# EAGLE board mbhp_core_v3 (EAGLE 6.4)
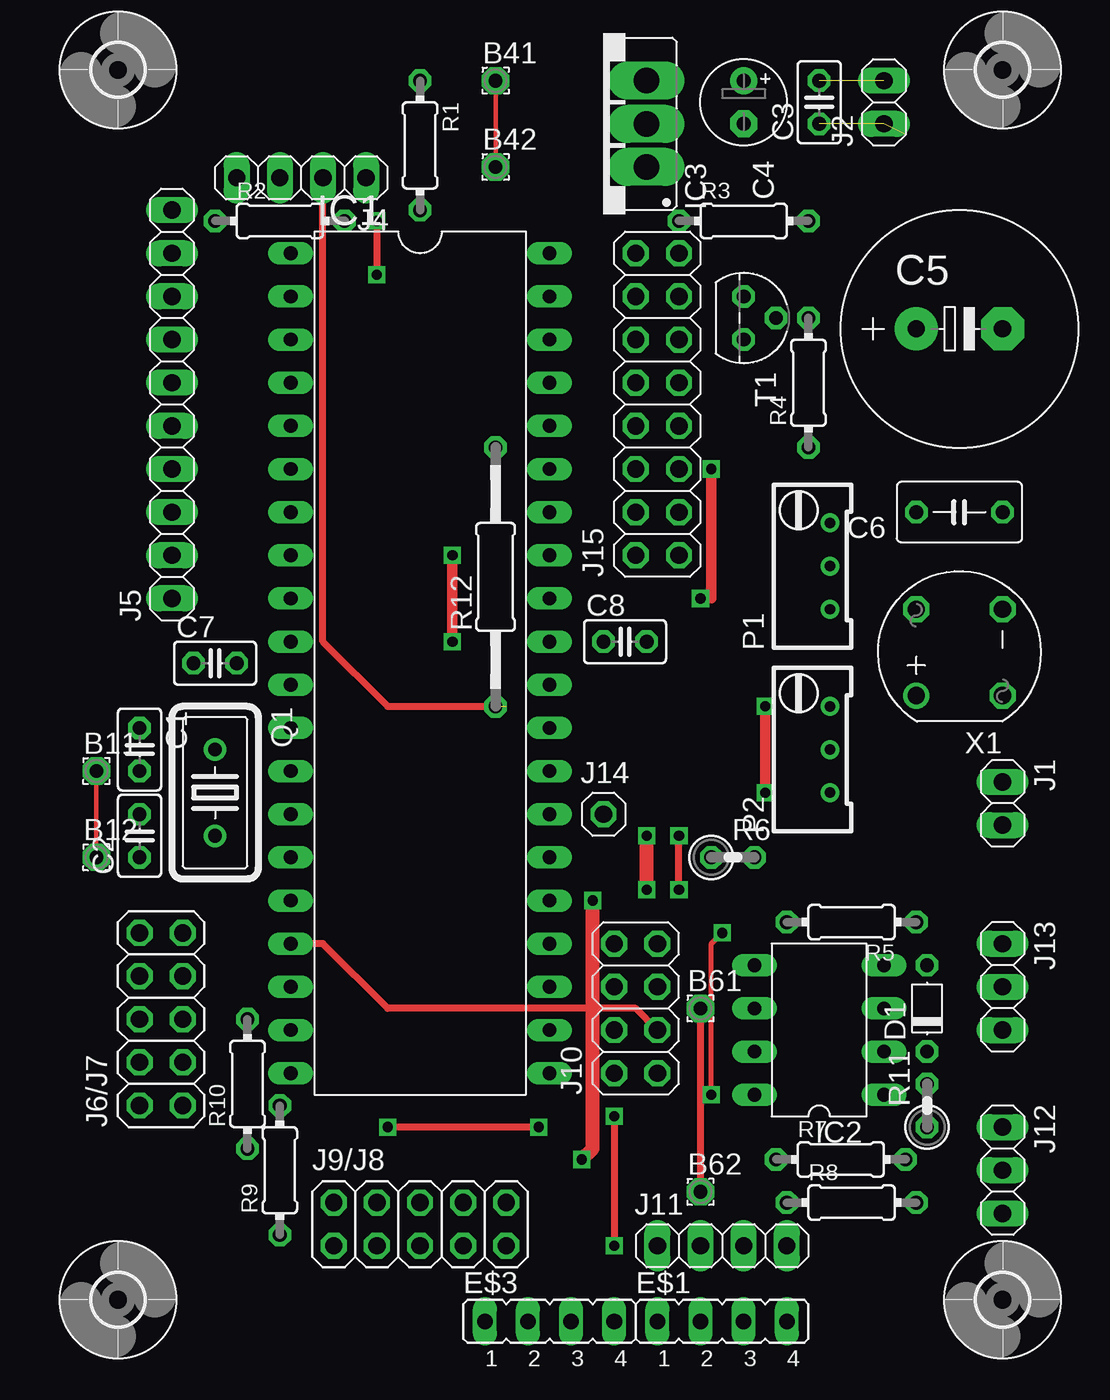
[diagram p0: board, top side]
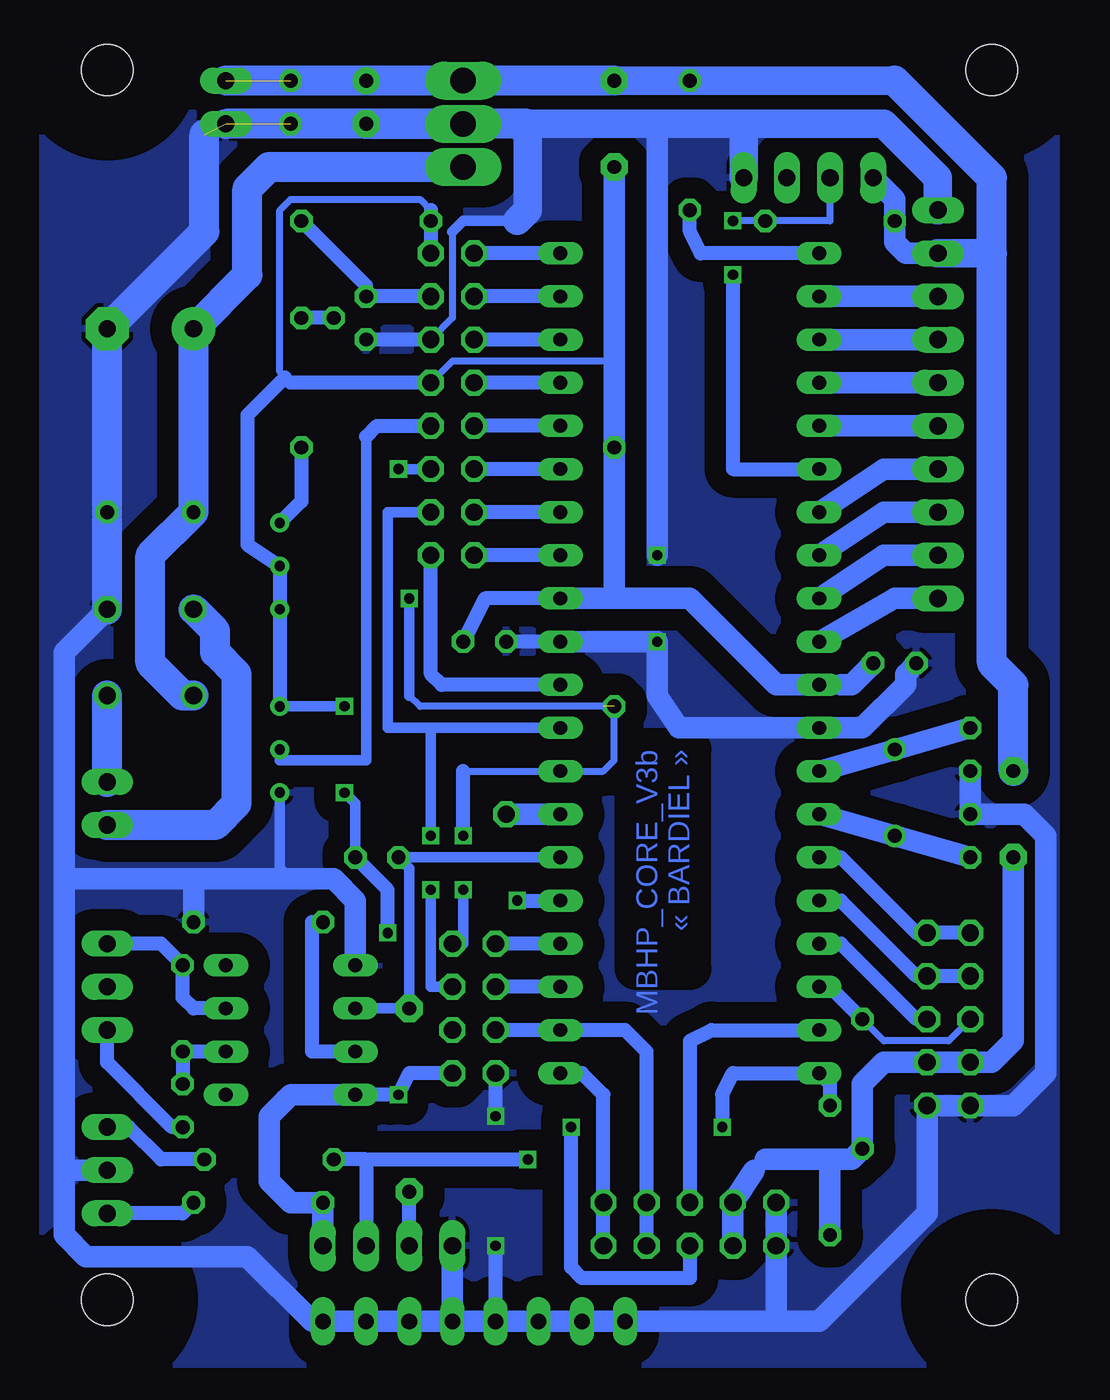
[diagram p1: board, bottom side, seen from below]

No outline drawn. Coordinates in mm, seen from the top.
Copper layers (1*16): Top 0.035mm / dielectric 1.5mm / Bottom 0.035mm
Design rules "default": minimum track width 10mil, minimum drill 24mil, track to track 8mil, track to pad 8mil, pad to pad 8mil, via to via 8mil, smd to smd 8mil, copper to edge 40mil, drill to drill 8mil, minimum pad ring 10mil, minimum via ring 8mil, stop-mask expansion 0mil, vias tented up to drill 0mil, thermal gap 10mil

## Footprints (pad centres in the part's own frame; a part is rotated, then mirrored left to right if it is on the bottom)
1,6/0,8 = drill 0.813 pad 1.6 octagon: 1 0,0
C025-025X050 = drill 0.813 octagon: 1 -1.27,0; 2 1.27,0
E2,5-5 = drill 0.813 pad 1.6: + -1.27,0 | drill 0.813 pad 1.6 octagon: - 1.27,0
E5-13 = drill 1.016 pad 2.54: + -2.54,0 | drill 1.016 pad 2.54 octagon: - 2.54,0
C050-035X075 = drill 0.813 octagon: 1 -2.54,0; 2 2.54,0
D-5 = drill 0.813 octagon: A 2.54,0; C -2.54,0
JP4 = drill 0.914 long: 1 -3.81,0; 2 -1.27,0; 3 1.27,0; 4 3.81,0
3,0 = hole 3: 0,0
DIL40 = drill 0.813 long: 1 -24.13,-7.62; 2 -21.59,-7.62; 3 -19.05,-7.62; 4 -16.51,-7.62; 5 -13.97,-7.62; 6 -11.43,-7.62; 7 -8.89,-7.62; 8 -6.35,-7.62; 9 -3.81,-7.62; 10 -1.27,-7.62; 11 1.27,-7.62; 12 3.81,-7.62; 13 6.35,-7.62; 14 8.89,-7.62; 15 11.43,-7.62; 16 13.97,-7.62; 17 16.51,-7.62; 18 19.05,-7.62; 19 21.59,-7.62; 20 24.13,-7.62; 21 24.13,7.62; 22 21.59,7.62; 23 19.05,7.62; 24 16.51,7.62; 25 13.97,7.62; 26 11.43,7.62; 27 8.89,7.62; 28 6.35,7.62; 29 3.81,7.62; 30 1.27,7.62; 31 -1.27,7.62; 32 -3.81,7.62; 33 -6.35,7.62; 34 -8.89,7.62; 35 -11.43,7.62; 36 -13.97,7.62; 37 -16.51,7.62; 38 -19.05,7.62; 39 -21.59,7.62; 40 -24.13,7.62
DIL08 = drill 0.813 long: 1 -3.81,-3.81; 2 -1.27,-3.81; 3 1.27,-3.81; 4 3.81,-3.81; 5 3.81,3.81; 6 1.27,3.81; 7 -1.27,3.81; 8 -3.81,3.81
78XXS_ = drill 1.499 pad 1.93 long: GND 0,-2.54; IN -2.54,-2.54; OUT 2.54,-2.54
1X02 = drill 1.016 long: 1 -1.27,0; 2 1.27,0
1X04 = drill 1.016 long: 1 -3.81,0; 2 -1.27,0; 3 1.27,0; 4 3.81,0
1X10 = drill 1.016 long: 1 -11.43,0; 2 -8.89,0; 3 -6.35,0; 4 -3.81,0; 5 -1.27,0; 6 1.27,0; 7 3.81,0; 8 6.35,0; 9 8.89,0; 10 11.43,0
2X05 = drill 1.016 octagon: 1 -5.08,-1.27; 2 -5.08,1.27; 3 -2.54,-1.27; 4 -2.54,1.27; 5 0,-1.27; 6 0,1.27; 7 2.54,-1.27; 8 2.54,1.27; 9 5.08,-1.27; 10 5.08,1.27
2X04 = drill 1.016 octagon: 1 -3.81,-1.27; 2 -3.81,1.27; 3 -1.27,-1.27; 4 -1.27,1.27; 5 1.27,-1.27; 6 1.27,1.27; 7 3.81,-1.27; 8 3.81,1.27
1X03 = drill 1.016 long: 1 -2.54,0; 2 0,0; 3 2.54,0
1X01 = drill 1.016 octagon: 1 0,0
2X08 = drill 1.016 octagon: 1 -8.89,-1.27; 2 -8.89,1.27; 3 -6.35,-1.27; 4 -6.35,1.27; 5 -3.81,-1.27; 6 -3.81,1.27; 7 -1.27,-1.27; 8 -1.27,1.27; 9 1.27,-1.27; 10 1.27,1.27; 11 3.81,-1.27; 12 3.81,1.27; 13 6.35,-1.27; 14 6.35,1.27; 15 8.89,-1.27; 16 8.89,1.27
RTRIM64W = drill 0.61: 1 1.27,-2.54; 2 1.27,0; 3 1.27,2.54
HC18U-V = drill 0.813: 1 -2.54,0; 2 2.54,0
0204/7 = drill 0.813 octagon: 1 -3.81,0; 2 3.81,0
0207/2V = drill 0.813 octagon: 1 -1.27,0; 2 1.27,0
0207/15 = drill 0.813 octagon: 1 -7.62,0; 2 7.62,0
TO92 = drill 0.813 octagon: 1 1.27,0; 2 0,1.905; 3 -1.27,0
RB1A = drill 1.016: + -2.54,2.54 | drill 1.016 octagon: - 2.54,-2.54; AC1 2.54,2.54; AC2 -2.54,-2.54

## Placement (x,y rotation side)
B11  [1,6/0,8]  2.54,34.92 0 top
B12  [1,6/0,8]  2.54,29.84 0 top
B41  [1,6/0,8]  26.04,75.56 0 top
B42  [1,6/0,8]  26.04,70.48 0 top
B61  [1,6/0,8]  38.1,20.95 0 top
B62  [1,6/0,8]  38.1,10.16 0 top
C1  33pF  [C025-025X050]  5.08,36.2 270 top
C2  33pF  [C025-025X050]  5.08,31.11 90 top
C3  100nF  [C025-025X050]  45.09,74.3 90 top
C4  10uF  [E2,5-5]  40.64,74.3 270 top
C5  2200uF  [E5-13]  53.34,60.96 0 top
C6  330nF  [C050-035X075]  53.34,50.16 180 top
C7  100nF  [C025-025X050]  9.53,41.27 0 top
C8  100nF  [C025-025X050]  33.66,42.55 0 top
D1  1N4148  [D-5]  51.44,20.95 90 top
E$1  [JP4]  39.37,2.54 0 top
E$3  [JP4]  29.21,2.54 0 top
E$26  [3,0]  3.81,76.2 0 top
E$27  [3,0]  55.88,76.2 0 top
E$28  [3,0]  55.88,3.81 0 top
E$29  [3,0]  3.81,3.81 0 top
IC1  PIC18F452  [DIL40]  21.59,41.27 270 top
IC2  6N138  [DIL08]  45.09,19.68 90 top
IC3  7805  [78XXS_]  32.38,73.03 90 top
J1  [1X02]  55.88,33.02 270 top
J2  [1X02]  48.9,74.3 90 top
J4  [1X04]  14.61,69.85 180 top
J5  [1X10]  6.99,56.52 90 top
J6/J7  [2X05]  6.35,20.32 90 top
J9/J8  [2X05]  21.59,8.26 0 top
J10  [2X04]  34.29,20.95 90 top
J11  [1X04]  39.37,6.99 0 top
J12  [1X03]  55.88,11.43 270 top
J13  [1X03]  55.88,22.23 270 top
J14  [1X01]  32.38,32.38 0 top
J15  [2X08]  35.56,56.52 90 top
P1  10k  [RTRIM64W]  44.45,46.99 0 top
P2  10k  [RTRIM64W]  44.45,36.2 0 top
Q1  10-HC18  [HC18U-V]  9.53,33.66 270 top
R1  100  [0204/7]  21.59,71.75 270 top
R2  1k  [0204/7]  13.34,67.31 0 top
R3  10k  [0204/7]  40.64,67.31 0 top
R4  1k  [0204/7]  44.45,57.78 90 top
R5  5.6k  [0204/7]  46.99,26.04 180 top
R6  1.2k  [0207/2V]  40.01,29.84 0 top
R7  220  [0204/7]  46.35,12.06 0 top
R8  220  [0204/7]  46.99,9.53 0 top
R9  10k  [0204/7]  13.34,11.43 90 top
R10  10k  [0204/7]  11.43,16.51 90 top
R11  220  [0207/2V]  51.44,15.24 90 top
R12  1k  [0207/15]  26.04,46.35 90 top
T1  BC337  [TO92]  40.64,61.59 270 top
X1  [RB1A]  53.34,41.91 90 top

## Library data of the parts
B11 B12 B41 B42 B61 B62 = wirepad
C1-C8 P1 P2 R1-R12 = rcl
D1 = diode
E$1 E$3 = jumper
E$26-E$29 = holes
IC1 = microchip
IC2 = dil
IC3 = v-reg
J1 J2 J4 J5 J6/J7 J9/J8 J10-J15 = pinhead
Q1 = crystal
T1 = transistor-npn
X1 = rectifier

## Nets
P2: J15.7 P2.2
S$1: C1.1 IC1.13 Q1.1
S$2: C2.1 IC1.14 Q1.2
S$3: R4.2 T1.2
S$4: IC1.40 J15.16
S$5: P1.3 R4.1
S$6: IC1.39 J15.14
S$7: IC1.1 R1.2
S$9: IC1.28 J10.7 J15.5 R12.1
S$10: IC1.22 J9/J8.7 J9/J8.8 J10.4
S$11: IC1.6 J4.3 R2.2
S$12: IC1.15 J6/J7.9 J6/J7.10
S$13: IC1.16 J6/J7.7 J6/J7.8
S$14: IC1.10 J5.1
S$15: IC1.9 J5.2
S$16: IC1.8 J5.3
S$17: IC1.7 J5.4
S$18: IC1.5 J5.5
S$19: IC1.4 J5.6
S$20: IC1.3 J5.7
S$21: IC1.2 J5.8
S$22: J4.2
S$23: IC1.17 J6/J7.5 J10.3
S$24: IC1.18 J6/J7.6 R10.2
S$25: IC1.20 J9/J8.5 R9.2
S$26: IC1.19 J9/J8.6
S$27: IC1.33 J15.2
S$28: IC1.34 J15.4
S$29: IC1.35 J15.6
S$30: IC1.36 J15.8
S$31: IC1.37 J15.10
S$32: IC1.38 J15.12
S$35: IC1.30 J15.1
S$36: IC1.29 J10.5 J15.3
S$39: J15.13 R3.2 T1.3
S$42: B61.1 B62.1 IC1.26 IC2.6 J11.2 R6.1
S$43: IC2.7 R5.2
S$44: D1.A IC2.3 J13.1
S$45: D1.C IC2.2 R11.2
S$46: C5.+ C6.2 IC3.IN X1.+
S$47: J12.1 R7.2
S$48: J12.3 R8.2
S$49: IC1.23 J10.6
S$50: IC1.24 J10.8
S$51: IC1.25 J11.3 R7.1
S$52: J1.1 X1.AC2
S$53: J1.2 X1.AC1
S$54: J13.3 R11.1
S$55: IC1.27 J14.1
S$56: IC1.21 J9/J8.9 J9/J8.10
VDD: B11.1 B12.1 B41.1 B42.1 C3.2 C4.+ C7.2 C8.2 IC1.11 IC1.32 IC2.8 IC3.OUT J2.2 J4.4 J5.9 J6/J7.3 J6/J7.4 J9/J8.3 J9/J8.4 J10.1 J11.4 J15.9 J15.15 P1.1 P1.2 P2.3 R1.1 R2.1 R3.1 R6.2 R8.1 R9.1 R10.1 R12.2
VSS: C1.2 C2.2 C3.1 C4.- C5.- C6.1 C7.1 C8.1 IC1.12 IC1.31 IC2.5 IC3.GND J2.1 J4.1 J5.10 J6/J7.1 J6/J7.2 J9/J8.1 J9/J8.2 J10.2 J11.1 J12.2 J15.11 P2.1 R5.1 T1.1 X1.-

## Tracks (layer width: path | path; a pad name or v marks a point on that pad's centre or on a via)
P2
  Bottom 0.61: P2.2 45.72,35.56 40.64,35.56 40.64,54.61
  Bottom 0.813: 40.64,54.61 40.01,55.24 J15.7
S$1
  Bottom 1.27: IC1.13 Q1.1 C1.1
S$2
  Bottom 1.27: IC1.14 Q1.2 C2.1
S$3
  Bottom 0.813: T1.2 R4.2
S$4
  Bottom 0.813: IC1.40 J15.16
S$5
  Bottom 0.813: R4.1 44.45,50.8 P1.3
S$6
  Bottom 0.813: IC1.39 J15.14
S$7
  Bottom 0.813: IC1.1 20.95,65.41 21.59,66.67 R1.2
S$9  (via drill 0.6)  (1 unrouted)
  Top 0.61: v38.73,52.7 38.73,45.09 v38.1,45.09
  Top 0.813: v34.92,27.94 v34.92,31.11
  Bottom 0.406: 26.04,38.1 26.67,38.73 37.47,38.73 38.1,39.37 | 34.92,34.92 IC1.28 26.67,34.92 26.04,35.56 R12.1
  Bottom 0.61: J15.5 v38.73,52.7 | v38.1,45.09 38.1,39.37 | J10.7 34.92,24.77 v34.92,27.94
  Bottom 0.813: v34.92,31.11 34.92,34.92
S$10
  Bottom 0.813: J9/J8.7 J9/J8.8 24.13,18.41 25.4,19.68 IC1.22 J10.4
S$11  (via drill 0.6)
  Top 0.406: v19.05,67.31 v19.05,64.14
  Bottom 0.406: J4.3 13.34,67.31 R2.2 v19.05,67.31
  Bottom 0.813: v19.05,64.14 19.05,52.7 IC1.6
S$12
  Bottom 0.813: J6/J7.10 J6/J7.9 8.26,25.4 12.7,29.84 IC1.15
S$13
  Bottom 0.406: J6/J7.7 6.99,22.86
  Bottom 0.813: J6/J7.8 J6/J7.7 8.26,22.86 12.7,27.3 IC1.16
S$14
  Bottom 1.27: J5.1 9.53,45.09 IC1.10
S$15
  Bottom 1.27: J5.2 10.16,47.62 IC1.9
S$16
  Bottom 1.27: J5.3 10.16,50.16 IC1.8
S$17
  Bottom 1.27: J5.4 10.16,52.7 IC1.7
S$18
  Bottom 1.27: J5.5 IC1.5
S$19
  Bottom 1.27: J5.6 IC1.4
S$20
  Bottom 1.27: J5.7 IC1.3
S$21
  Bottom 1.27: J5.8 IC1.2
S$22
  Top 0.406: J4.2 15.88,42.55 19.68,38.73 26.04,38.73
S$23
  Top 0.406: J10.3 34.29,20.95 19.68,20.95 15.88,24.77 IC1.17
  Bottom 0.813: J6/J7.5 8.26,20.32 12.7,24.77 IC1.17
S$24
  Bottom 0.406: R10.2 10.16,19.05 6.35,19.05 J6/J7.6
  Bottom 0.813: IC1.18 13.34,22.23 R10.2
S$25  (via drill 0.6)
  Top 0.406: v28.57,13.97 v19.68,13.97
  Bottom 0.813: R9.2 13.34,16.51 IC1.20 19.05,17.14 19.68,15.88 v19.68,13.97 | J9/J8.5 21.59,5.08 27.94,5.08 28.57,5.71 v28.57,13.97
S$26
  Bottom 0.813: IC1.19 20.32,19.68 21.59,19.05 J9/J8.6
S$27
  Bottom 0.813: IC1.33 J15.2
S$28
  Bottom 0.813: IC1.34 J15.4
S$29
  Bottom 0.813: IC1.35 J15.6
S$30
  Bottom 0.813: IC1.36 J15.8
S$31
  Bottom 0.813: IC1.37 J15.10
S$32
  Bottom 0.813: IC1.38 J15.12
S$35
  Bottom 0.813: IC1.30 36.2,40.01 36.83,40.64 J15.1
S$36  (via drill 0.6)
  Top 0.406: v36.83,27.94 v36.83,31.11
  Bottom 0.61: v36.83,27.94 36.83,22.23 J10.5 | J15.3 39.37,50.16 39.37,37.47 36.83,37.47 | 36.83,37.47 IC1.29 | v36.83,31.11 36.83,37.47
S$39
  Bottom 0.813: J15.13 T1.3 40.64,63.5 R3.2
S$42
  Top 0.406: B62.1 B61.1
  Bottom 0.61: IC1.26 R6.1 38.1,29.21 B61.1 IC2.6
  Bottom 0.813: J11.2 B62.1
S$43
  Bottom 0.813: IC2.7 43.81,18.41 43.81,26.04 R5.2
S$44
  Bottom 0.813: IC2.3 50.8,20.95 51.44,21.59 D1.A 52.7,24.77 J13.1
S$45
  Bottom 0.813: IC2.2 D1.C R11.2
S$46
  Bottom 1.778: X1.+ 51.44,39.37 53.34,41.27 53.34,47.62 C6.2 C5.+ 47.62,64.14 47.62,69.22 46.35,70.48 IC3.IN
S$47
  Bottom 0.813: R7.2 52.7,12.06 54.61,13.97 J12.1
S$48
  Bottom 0.813: J12.3 51.44,8.89 R8.2
S$49
  Bottom 0.813: IC1.23 J10.6
S$50
  Bottom 0.813: IC1.24 J10.8
S$51  (via drill 0.6)
  Top 0.813: v31.11,12.06 31.75,12.7 v31.75,27.3
  Bottom 0.813: 40.64,12.06 R7.1 | 40.64,12.06 J11.3 | 40.64,12.06 v31.11,12.06 | v31.75,27.3 IC1.25
S$52
  Bottom 1.778: J1.1 X1.AC2
S$53
  Bottom 1.778: J1.2 49.53,31.75 48.26,33.02 48.26,40.64 49.53,41.91 49.53,43.18 X1.AC1
S$54
  Bottom 0.813: R11.1 52.07,13.97 55.88,17.78 J13.3
S$55
  Bottom 1.27: IC1.27 J14.1
S$56
  Bottom 0.813: J9/J8.9 J9/J8.10 26.67,15.88 27.94,17.14 IC1.21
VDD  (via drill 0.6)  (1 unrouted)
  Top 0.254: B41.1 B42.1 | B12.1 B11.1
  Top 0.305: v38.73,15.88 38.73,24.77 v39.37,25.4
  Top 0.61: v41.91,38.73 v41.91,33.66
  Bottom 0.406: 45.09,15.88 45.72,15.88 | 17.14,12.06 17.78,11.43 | J15.9 35.56,59.05 26.04,59.05 | B42.1 26.04,69.85 | J15.15 R3.1 | 36.83,67.94 37.47,68.58 45.09,68.58 45.72,67.94 45.72,58.42 45.4,58.1 45.09,57.78 | IC1.11 12.7,40.01
  Bottom 0.61: P2.3 v41.91,38.73 | v41.91,33.66 41.27,33.02 R6.2
  Bottom 0.813: C8.2 33.66,45.09 IC1.32 | 36.83,67.94 J15.15 | J15.9 45.09,57.78 | 45.4,58.1 47.62,55.88 47.62,48.26 P1.2 P1.1 P2.3 | J10.1 38.1,17.14 v38.73,15.88 IC2.8 | v39.37,25.4 39.37,27.94 R6.2
  Bottom 1.27: 43.18,7.62 J11.4 R8.1 45.09,9.53 46.35,10.79 46.35,14.61 45.09,15.88 IC2.8 | 26.04,45.09 R12.2 26.04,59.05 26.04,69.85 | 26.04,45.09 IC1.32 | J9/J8.3 J9/J8.4 17.78,11.43 | 13.34,12.06 12.06,12.06 R10.1 11.43,16.51 10.16,17.78 J6/J7.3 J6/J7.4 3.81,17.78 2.54,19.05 B12.1 | 13.34,12.06 17.14,12.06 | R9.1 13.34,12.06 | J5.9 8.89,65.41 9.53,66.04 R2.1 9.53,68.58 J4.4 | 26.04,45.09 21.59,45.09 16.51,40.01 IC1.11 | 12.7,40.01 12.06,40.01 C7.2
  Bottom 1.676: 3.81,65.41 J5.9 | B41.1 R1.1 9.53,75.56
  Bottom 1.778: J2.2 IC3.OUT B41.1 C4.+ | 9.53,75.56 3.81,69.85 3.81,65.41 3.81,41.27 2.54,40.01 B11.1
VSS  (via drill 0.6)  (2 unrouted)
  Top 0.406: v33.02,14.61 v33.02,6.99
  Top 0.61: v23.5,42.55 v23.5,47.62
  Bottom 0.406: J15.11 35.56,61.59 35.56,66.67
  Bottom 0.61: 35.56,66.67 34.92,67.31 31.75,67.31 | 45.09,28.57 45.72,29.21 P2.1
  Bottom 0.813: IC1.31 C8.1 | J15.11 T1.1 | 33.02,2.54 v33.02,6.99 | v33.02,14.61 J10.2
  Bottom 1.27: IC2.5 41.27,27.3 42.55,28.57 45.09,28.57 50.8,28.57 | 50.8,28.57 R5.1 | X1.- 58.42,41.91 58.42,28.57 | 58.42,28.57 50.8,28.57 | 58.42,11.43 58.42,28.57 | 58.42,11.43 J12.2 | 35.56,2.54 43.81,2.54 47.62,6.35 57.15,6.35 58.42,7.62 58.42,11.43 | 35.56,2.54 J11.1 | 16.51,2.54 13.97,2.54 7.62,8.89 J6/J7.1 J6/J7.2 2.54,15.24 0.64,17.14 0.64,31.11 1.91,32.38 C2.2 C1.2 | 16.51,2.54 33.02,2.54 35.56,2.54 | IC1.31 v23.5,42.55 23.5,39.37 22.23,37.47 IC1.12 11.43,37.47 8.89,40.01 8.89,40.64 C7.1 | 16.51,2.54 J9/J8.1 J9/J8.2 | v23.5,47.62 23.5,73.03
  Bottom 1.676: 31.75,67.31 31.11,67.94 31.11,73.03 23.5,73.03 18.41,73.03 | 18.41,73.03 J4.1 | 18.41,73.03 10.16,73.03 6.99,69.85 J5.10
  Bottom 1.778: 31.11,73.03 C4.- IC3.GND J2.1 | 50.16,72.39 50.16,66.67 C5.- C6.1 X1.-
  pour Bottom (isolate 1.27): 0,80.01 59.69,80.01 59.69,0 0,0

## Text on the board
Bottom: MBHP_CORE_V3b / « BARDIEL »